# EAGLE board cyclops_r3_silk (EAGLE 6.4), part 1 of 5
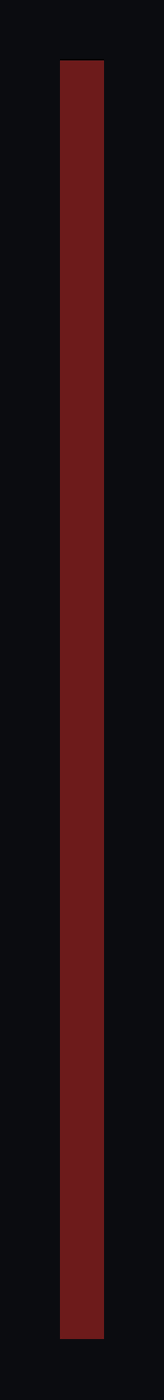
[diagram p0: board, top side]
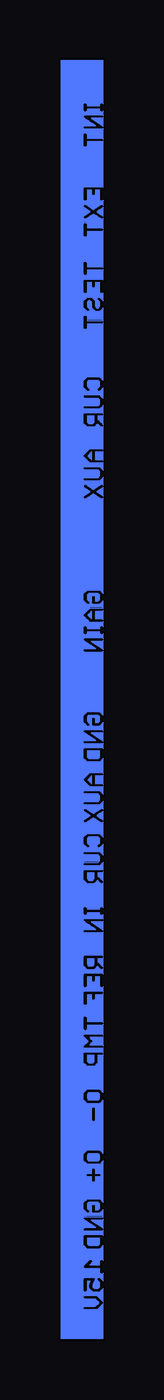
[diagram p1: board, bottom side, seen from below]

No outline drawn. Coordinates in mm, seen from the top.
Copper layers (1*16): Top 0.035mm / dielectric 1.5mm / Bottom 0.035mm
Design rules "default": minimum track width 10mil, minimum drill 24mil, track to track 8mil, track to pad 8mil, pad to pad 8mil, via to via 8mil, smd to smd 8mil, copper to edge 40mil, drill to drill 8mil, minimum pad ring 10mil, minimum via ring 8mil, stop-mask expansion 4mil, vias tented up to drill 0mil, thermal gap 10mil

## Placement (x,y rotation side)

## Tracks (layer width: path | path; a pad name or v marks a point on that pad's centre or on a via)
N$8
  pour Top (no thermals): 0,53.34 1.78,53.34 1.78,0 0,0
S$1
  Bottom 0.025: 0.01,4.98 0,4.99 0,4.98 | 0.01,4.98 0.03,4.95 0.5,4.95 0.04,4.65 0.03,4.65 0.01,4.63 0,4.62 | 0,4.62 0,4.65 | 0,4.65 0,4.67 | 0,4.67 0,4.7 | 0,4.7 0,4.72 | 0,4.72 0,4.75 | 0,4.75 0,4.78 | 0,4.78 0,4.8 | 0,4.8 0,4.83 | 0,4.83 0,4.85 | 0,4.85 0,4.88 | 0,4.88 0,4.9 | 0,4.9 0,4.93 | 0,4.93 0,4.95 | 0,4.95 0,4.98 | 0,4.62 | 0,4.65 0.03,4.65 | 0,4.67 0.08,4.67 | 0,4.7 0.12,4.7 | 0,4.72 0.15,4.72 | 0,4.75 0.19,4.75 | 0,4.78 0.23,4.78 | 0,4.8 0.27,4.8 | 0,4.83 0.31,4.83 | 0,4.85 0.34,4.85 | 0,4.88 0.38,4.88 | 0,4.9 0.42,4.9 | 0,4.93 0.46,4.93 | 0,4.95 0.5,4.95 | 0,4.98 0.01,4.98
S$2
  Bottom 0.025: 0.14,3.99 0.14,3.97 0.21,3.9 0.6,3.9 0.67,3.97 0.67,3.99 | 0.14,3.99 0.14,4.01 | 0.14,4.01 0.14,4.04 | 0.14,4.04 0.14,4.06 | 0.14,4.06 0.14,4.09 | 0.14,4.09 0.14,4.12 | 0.14,4.12 0.14,4.14 | 0.14,4.14 0.14,4.17 | 0.14,4.17 0.14,4.19 | 0.14,4.19 0.14,4.21 0.67,4.21 0.67,4.19 | 0.67,4.19 0.67,4.17 | 0.67,4.17 0.67,4.14 | 0.67,4.14 0.67,4.12 | 0.67,4.12 0.67,4.09 | 0.67,4.09 0.67,4.06 | 0.67,4.06 0.67,4.04 | 0.67,4.04 0.67,4.01 | 0.67,4.01 0.67,3.99 | 0.14,3.99 0.67,3.99 | 0.14,4.01 0.67,4.01 | 0.14,4.04 0.67,4.04 | 0.14,4.06 0.67,4.06 | 0.14,4.09 0.67,4.09 | 0.14,4.12 0.67,4.12 | 0.14,4.14 0.67,4.14 | 0.14,4.17 0.67,4.17 | 0.14,4.19 0.67,4.19
S$3
  Bottom 0.025: 0.2,7.44 0.21,7.43 0.6,7.43 0.62,7.44 | 0.2,7.44 0.17,7.47 | 0.17,7.47 0.15,7.49 | 0.15,7.49 0.14,7.5 0.14,7.52 | 0.14,7.52 0.14,7.54 | 0.14,7.54 0.14,7.57 | 0.14,7.57 0.14,7.59 | 0.14,7.59 0.14,7.62 | 0.14,7.62 0.14,7.64 | 0.14,7.64 0.14,7.67 0.15,7.67 | 0.15,7.67 0.17,7.7 | 0.17,7.7 0.2,7.72 | 0.2,7.72 0.21,7.73 0.6,7.73 0.62,7.72 | 0.62,7.72 0.64,7.7 | 0.64,7.7 0.67,7.67 | 0.67,7.67 0.67,7.64 | 0.67,7.64 0.67,7.62 | 0.67,7.62 0.67,7.59 | 0.67,7.59 0.67,7.57 | 0.67,7.57 0.67,7.54 | 0.67,7.54 0.67,7.52 | 0.67,7.52 0.67,7.5 0.67,7.49 | 0.67,7.49 0.64,7.47 | 0.64,7.47 0.62,7.44 | 0.2,7.44 0.62,7.44 | 0.17,7.47 0.64,7.47 | 0.15,7.49 0.67,7.49 | 0.14,7.52 0.67,7.52 | 0.14,7.54 0.67,7.54 | 0.14,7.57 0.67,7.57 | 0.14,7.59 0.67,7.59 | 0.14,7.62 0.67,7.62 | 0.14,7.64 0.67,7.64 | 0.15,7.67 0.67,7.67 | 0.17,7.7 0.64,7.7 | 0.2,7.72 0.62,7.72
S$4
  Bottom 0.025: 0,35.18 0,35.17 0.27,35.35 0,35.53 0,35.51 | 0,35.18 0,35.2 | 0,35.2 0,35.23 | 0,35.23 0,35.26 | 0,35.26 0,35.28 | 0,35.28 0,35.31 | 0,35.31 0,35.33 | 0,35.33 0,35.36 | 0,35.36 0,35.38 | 0,35.38 0,35.41 | 0,35.41 0,35.43 | 0,35.43 0,35.46 | 0,35.46 0,35.48 | 0,35.48 0,35.51 | 0,35.18 0.01,35.18 | 0,35.2 0.05,35.2 | 0,35.23 0.09,35.23 | 0,35.26 0.13,35.26 | 0,35.28 0.17,35.28 | 0,35.31 0.2,35.31 | 0,35.33 0.24,35.33 | 0,35.36 0.26,35.36 | 0,35.38 0.22,35.38 | 0,35.41 0.18,35.41 | 0,35.43 0.14,35.43 | 0,35.46 0.1,35.46 | 0,35.48 0.07,35.48 | 0,35.51 0.03,35.51
S$5
  Bottom 0.025: 0.01,30.38 0,30.39 0,30.38 | 0.01,30.38 0.03,30.35 0.33,30.35 | 0.33,30.35 0.33,30.33 | 0.33,30.33 0.33,30.3 | 0.33,30.3 0.33,30.28 | 0.33,30.28 0.33,30.25 | 0.33,30.25 0.33,30.23 | 0.33,30.23 0.33,30.2 | 0.33,30.2 0.33,30.18 | 0.33,30.18 0.33,30.15 | 0.33,30.15 0.33,30.12 | 0.33,30.12 0.33,30.1 | 0.33,30.1 0.33,30.07 | 0.33,30.07 0.33,30.05 0.03,30.05 | 0.03,30.05 0.01,30.02 | 0.01,30.02 0,30.02 | 0,30.02 0,30.05 | 0,30.05 0,30.07 | 0,30.07 0,30.1 | 0,30.1 0,30.12 | 0,30.12 0,30.15 | 0,30.15 0,30.18 | 0,30.18 0,30.2 | 0,30.2 0,30.23 | 0,30.23 0,30.25 | 0,30.25 0,30.28 | 0,30.28 0,30.3 | 0,30.3 0,30.33 | 0,30.33 0,30.35 | 0,30.35 0,30.38 | 0,30.02 0.01,30.02 | 0,30.05 0.03,30.05 | 0,30.07 0.33,30.07 | 0,30.1 0.33,30.1 | 0,30.12 0.33,30.12 | 0,30.15 0.33,30.15 | 0,30.18 0.33,30.18 | 0,30.2 0.33,30.2 | 0,30.23 0.33,30.23 | 0,30.25 0.33,30.25 | 0,30.28 0.33,30.28 | 0,30.3 0.33,30.3 | 0,30.33 0.33,30.33 | 0,30.35 0.33,30.35 | 0,30.38 0.01,30.38
S$6
  Bottom 0.025: 0.49,30.35 0.48,30.35 | 0.49,30.35 0.52,30.33 | 0.52,30.33 0.54,30.3 | 0.54,30.3 0.57,30.28 | 0.57,30.28 0.59,30.25 | 0.59,30.25 0.62,30.23 | 0.62,30.23 0.64,30.2 | 0.64,30.2 0.62,30.18 | 0.62,30.18 0.59,30.15 | 0.59,30.15 0.56,30.12 | 0.56,30.12 0.54,30.1 | 0.54,30.1 0.51,30.07 | 0.51,30.07 0.49,30.05 0.48,30.05 0.48,30.07 | 0.48,30.07 0.48,30.1 | 0.48,30.1 0.48,30.12 | 0.48,30.12 0.48,30.15 | 0.48,30.15 0.48,30.18 | 0.48,30.18 0.48,30.2 | 0.48,30.2 0.48,30.23 | 0.48,30.23 0.48,30.25 | 0.48,30.25 0.48,30.28 | 0.48,30.28 0.48,30.3 | 0.48,30.3 0.48,30.33 | 0.48,30.33 0.48,30.35 | 0.48,30.07 0.51,30.07 | 0.48,30.1 0.54,30.1 | 0.48,30.12 0.56,30.12 | 0.48,30.15 0.59,30.15 | 0.48,30.18 0.62,30.18 | 0.48,30.2 0.64,30.2 | 0.48,30.23 0.62,30.23 | 0.48,30.25 0.59,30.25 | 0.48,30.28 0.57,30.28 | 0.48,30.3 0.54,30.3 | 0.48,30.33 0.52,30.33 | 0.48,30.35 0.49,30.35
S$7
  Bottom 0.025: 0.01,28.78 0.03,28.8 0.04,28.8 0.5,29.11 0.03,29.11 0,29.14 0,29.13 | 0.01,28.78 0,28.77 0,28.78 | 0,28.78 0,28.8 | 0,28.8 0,28.83 | 0,28.83 0,28.85 | 0,28.85 0,28.88 | 0,28.88 0,28.91 | 0,28.91 0,28.93 | 0,28.93 0,28.96 | 0,28.96 0,28.98 | 0,28.98 0,29.01 | 0,29.01 0,29.03 | 0,29.03 0,29.06 | 0,29.06 0,29.08 | 0,29.08 0,29.11 | 0,29.11 0,29.13 | 0,28.78 0.01,28.78 | 0,28.8 0.04,28.8 | 0,28.83 0.08,28.83 | 0,28.85 0.12,28.85 | 0,28.88 0.16,28.88 | 0,28.91 0.2,28.91 | 0,28.93 0.23,28.93 | 0,28.96 0.27,28.96 | 0,28.98 0.31,28.98 | 0,29.01 0.35,29.01 | 0,29.03 0.39,29.03 | 0,29.06 0.42,29.06 | 0,29.08 0.46,29.08 | 0,29.11 0.03,29.11 | 0,29.13 0.01,29.13
S$8
  Bottom 0.025: 0.14,24.31 0.14,24.29 0.21,24.22 0.6,24.22 0.67,24.29 0.67,24.31 | 0.14,24.31 0.14,24.33 | 0.14,24.33 0.14,24.36 | 0.14,24.36 0.14,24.38 | 0.14,24.38 0.14,24.41 | 0.14,24.41 0.14,24.43 | 0.14,24.43 0.14,24.46 | 0.14,24.46 0.14,24.49 | 0.14,24.49 0.14,24.51 | 0.14,24.51 0.14,24.53 0.67,24.53 0.67,24.51 | 0.67,24.51 0.67,24.49 | 0.67,24.49 0.67,24.46 | 0.67,24.46 0.67,24.43 | 0.67,24.43 0.67,24.41 | 0.67,24.41 0.67,24.38 | 0.67,24.38 0.67,24.36 | 0.67,24.36 0.67,24.33 | 0.67,24.33 0.67,24.31 | 0.14,24.31 0.67,24.31 | 0.14,24.33 0.67,24.33 | 0.14,24.36 0.67,24.36 | 0.14,24.38 0.67,24.38 | 0.14,24.41 0.67,24.41 | 0.14,24.43 0.67,24.43 | 0.14,24.46 0.67,24.46 | 0.14,24.49 0.67,24.49 | 0.14,24.51 0.67,24.51
S$9
  Bottom 0.025: 0.02,23.5 0,23.51 0,23.5 | 0.02,23.5 0.03,23.48 0.33,23.48 0.33,23.47 | 0.33,23.47 0.33,23.44 | 0.33,23.44 0.33,23.42 | 0.33,23.42 0.33,23.39 | 0.33,23.39 0.33,23.37 | 0.33,23.37 0.33,23.34 | 0.33,23.34 0.33,23.32 | 0.33,23.32 0.33,23.29 | 0.33,23.29 0.33,23.27 | 0.33,23.27 0.33,23.24 | 0.33,23.24 0.33,23.22 | 0.33,23.22 0.33,23.19 | 0.33,23.19 0.33,23.18 0.03,23.18 0.02,23.16 | 0.02,23.16 0,23.14 0,23.16 | 0,23.16 0,23.19 | 0,23.19 0,23.22 | 0,23.22 0,23.24 | 0,23.24 0,23.27 | 0,23.27 0,23.29 | 0,23.29 0,23.32 | 0,23.32 0,23.34 | 0,23.34 0,23.37 | 0,23.37 0,23.39 | 0,23.39 0,23.42 | 0,23.42 0,23.44 | 0,23.44 0,23.47 | 0,23.47 0,23.5 | 0,23.16 0.02,23.16 | 0,23.19 0.33,23.19 | 0,23.22 0.33,23.22 | 0,23.24 0.33,23.24 | 0,23.27 0.33,23.27 | 0,23.29 0.33,23.29 | 0,23.32 0.33,23.32 | 0,23.34 0.33,23.34 | 0,23.37 0.33,23.37 | 0,23.39 0.33,23.39 | 0,23.42 0.33,23.42 | 0,23.44 0.33,23.44 | 0,23.47 0.33,23.47 | 0,23.5 0.02,23.5
S$10
  Bottom 0.025: 0.5,23.47 0.49,23.48 0.48,23.48 0.48,23.47 | 0.5,23.47 0.53,23.44 | 0.53,23.44 0.55,23.42 | 0.55,23.42 0.58,23.39 | 0.58,23.39 0.6,23.37 | 0.6,23.37 0.63,23.34 | 0.63,23.34 0.64,23.33 0.63,23.32 | 0.63,23.32 0.6,23.29 | 0.6,23.29 0.58,23.27 | 0.58,23.27 0.55,23.24 | 0.55,23.24 0.53,23.22 | 0.53,23.22 0.5,23.19 | 0.5,23.19 0.49,23.18 0.48,23.18 0.48,23.19 | 0.48,23.19 0.48,23.22 | 0.48,23.22 0.48,23.24 | 0.48,23.24 0.48,23.27 | 0.48,23.27 0.48,23.29 | 0.48,23.29 0.48,23.32 | 0.48,23.32 0.48,23.34 | 0.48,23.34 0.48,23.37 | 0.48,23.37 0.48,23.39 | 0.48,23.39 0.48,23.42 | 0.48,23.42 0.48,23.44 | 0.48,23.44 0.48,23.47 | 0.48,23.19 0.5,23.19 | 0.48,23.22 0.53,23.22 | 0.48,23.24 0.55,23.24 | 0.48,23.27 0.58,23.27 | 0.48,23.29 0.6,23.29 | 0.48,23.32 0.63,23.32 | 0.48,23.34 0.63,23.34 | 0.48,23.37 0.6,23.37 | 0.48,23.39 0.58,23.39 | 0.48,23.42 0.55,23.42 | 0.48,23.44 0.53,23.44 | 0.48,23.47 0.5,23.47
S$11
  Bottom 0.025: 0.01,25.3 0,25.31 0,25.3 | 0.01,25.3 0.03,25.27 0.5,25.27 0.04,24.97 0.03,24.97 0.01,24.95 0,24.94 | 0,24.94 0,24.97 | 0,24.97 0,24.99 | 0,24.99 0,25.02 | 0,25.02 0,25.04 | 0,25.04 0,25.07 | 0,25.07 0,25.09 | 0,25.09 0,25.12 | 0,25.12 0,25.15 | 0,25.15 0,25.17 | 0,25.17 0,25.2 | 0,25.2 0,25.22 | 0,25.22 0,25.25 | 0,25.25 0,25.27 | 0,25.27 0,25.3 | 0,24.94 | 0,24.97 0.03,24.97 | 0,24.99 0.08,24.99 | 0,25.02 0.12,25.02 | 0,25.04 0.15,25.04 | 0,25.07 0.19,25.07 | 0,25.09 0.23,25.09 | 0,25.12 0.27,25.12 | 0,25.15 0.31,25.15 | 0,25.17 0.34,25.17 | 0,25.2 0.38,25.2 | 0,25.22 0.42,25.22 | 0,25.25 0.46,25.25 | 0,25.27 0.5,25.27 | 0,25.3 0.01,25.3
S$12
  Bottom 0.025: 0.67,38.48 0.67,38.49 0.37,38.49 0.37,38.48 | 0.67,38.48 0.67,38.46 | 0.67,38.46 0.67,38.43 | 0.67,38.43 0.67,38.41 | 0.67,38.41 0.67,38.38 | 0.67,38.38 0.67,38.35 | 0.67,38.35 0.67,38.33 | 0.67,38.33 0.67,38.3 | 0.67,38.3 0.67,38.28 | 0.67,38.28 0.67,38.26 0.6,38.19 0.44,38.19 0.37,38.26 0.37,38.28 | 0.37,38.28 0.37,38.3 | 0.37,38.3 0.37,38.33 | 0.37,38.33 0.37,38.35 | 0.37,38.35 0.37,38.38 | 0.37,38.38 0.37,38.41 | 0.37,38.41 0.37,38.43 | 0.37,38.43 0.37,38.46 | 0.37,38.46 0.37,38.48 | 0.37,38.28 0.67,38.28 | 0.37,38.3 0.67,38.3 | 0.37,38.33 0.67,38.33 | 0.37,38.35 0.67,38.35 | 0.37,38.38 0.67,38.38 | 0.37,38.41 0.67,38.41 | 0.37,38.43 0.67,38.43 | 0.37,38.46 0.67,38.46 | 0.37,38.48 0.67,38.48
S$13
  Bottom 0.025: 0.63,36.83 0.64,36.85 0.49,37 0.48,37 0.48,36.98 | 0.63,36.83 0.6,36.8 | 0.6,36.8 0.57,36.78 | 0.57,36.78 0.55,36.75 | 0.55,36.75 0.52,36.73 | 0.52,36.73 0.5,36.7 | 0.5,36.7 0.49,36.69 0.48,36.69 0.48,36.7 | 0.48,36.7 0.48,36.73 | 0.48,36.73 0.48,36.75 | 0.48,36.75 0.48,36.78 | 0.48,36.78 0.48,36.8 | 0.48,36.8 0.48,36.83 | 0.48,36.83 0.48,36.85 | 0.48,36.85 0.48,36.88 | 0.48,36.88 0.48,36.91 | 0.48,36.91 0.48,36.93 | 0.48,36.93 0.48,36.96 | 0.48,36.96 0.48,36.98 | 0.48,36.7 0.5,36.7 | 0.48,36.73 0.52,36.73 | 0.48,36.75 0.55,36.75 | 0.48,36.78 0.57,36.78 | 0.48,36.8 0.6,36.8 | 0.48,36.83 0.63,36.83 | 0.48,36.85 0.63,36.85 | 0.48,36.88 0.61,36.88 | 0.48,36.91 0.58,36.91 | 0.48,36.93 0.56,36.93 | 0.48,36.96 0.53,36.96 | 0.48,36.98 0.51,36.98
S$14
  Bottom 0.025: 0.33,36.98 0.33,37 0.03,37 0,37.03 0,37.01 | 0.33,36.98 0.33,36.96 | 0.33,36.96 0.33,36.93 | 0.33,36.93 0.33,36.91 | 0.33,36.91 0.33,36.88 | 0.33,36.88 0.33,36.85 | 0.33,36.85 0.33,36.83 | 0.33,36.83 0.33,36.8 | 0.33,36.8 0.33,36.78 | 0.33,36.78 0.33,36.75 | 0.33,36.75 0.33,36.73 | 0.33,36.73 0.33,36.7 | 0.33,36.7 0.33,36.69 0.03,36.69 0.02,36.68 | 0.02,36.68 0,36.66 0,36.68 | 0,36.68 0,36.7 | 0,36.7 0,36.73 | 0,36.73 0,36.75 | 0,36.75 0,36.78 | 0,36.78 0,36.8 | 0,36.8 0,36.83 | 0,36.83 0,36.85 | 0,36.85 0,36.88 | 0,36.88 0,36.91 | 0,36.91 0,36.93 | 0,36.93 0,36.96 | 0,36.96 0,36.98 | 0,36.98 0,37.01 | 0,36.68 0.02,36.68 | 0,36.7 0.33,36.7 | 0,36.73 0.33,36.73 | 0,36.75 0.33,36.75 | 0,36.78 0.33,36.78 | 0,36.8 0.33,36.8 | 0,36.83 0.33,36.83 | 0,36.85 0.33,36.85 | 0,36.88 0.33,36.88 | 0,36.91 0.33,36.91 | 0,36.93 0.33,36.93 | 0,36.96 0.33,36.96 | 0,36.98 0.33,36.98 | 0,37.01 0.02,37.01
S$15
  Bottom 0.025: 0.02,38.51 0,38.53 0,38.51 | 0.02,38.51 0.03,38.49 0.22,38.49 0.22,38.48 | 0.22,38.48 0.22,38.46 | 0.22,38.46 0.22,38.43 | 0.22,38.43 0.22,38.41 | 0.22,38.41 0.22,38.38 | 0.22,38.38 0.22,38.37 0.2,38.35 | 0.2,38.35 0.17,38.33 | 0.17,38.33 0.14,38.3 | 0.14,38.3 0.12,38.28 | 0.12,38.28 0.09,38.25 | 0.09,38.25 0.07,38.23 | 0.07,38.23 0.04,38.2 | 0.04,38.2 0.02,38.18 | 0.02,38.18 0,38.16 0,38.18 | 0,38.18 0,38.2 | 0,38.2 0,38.23 | 0,38.23 0,38.25 | 0,38.25 0,38.28 | 0,38.28 0,38.3 | 0,38.3 0,38.33 | 0,38.33 0,38.35 | 0,38.35 0,38.38 | 0,38.38 0,38.41 | 0,38.41 0,38.43 | 0,38.43 0,38.46 | 0,38.46 0,38.48 | 0,38.48 0,38.51 | 0,38.18 0.02,38.18 | 0,38.2 0.04,38.2 | 0,38.23 0.07,38.23 | 0,38.25 0.09,38.25 | 0,38.28 0.12,38.28 | 0,38.3 0.14,38.3 | 0,38.33 0.17,38.33 | 0,38.35 0.2,38.35 | 0,38.38 0.22,38.38 | 0,38.41 0.22,38.41 | 0,38.43 0.22,38.43 | 0,38.46 0.22,38.46 | 0,38.48 0.22,38.48 | 0,38.51 0.02,38.51
S$16
  Bottom 0.025: 0,50.95 | 0,50.95 0.03,50.93 | 0.03,50.93 0.03,50.92 0.5,50.92 0.04,50.62 0.03,50.62 0.01,50.6 | 0.01,50.6 0,50.59 0,50.6 | 0,50.6 0,50.62 | 0,50.62 0,50.65 | 0,50.65 0,50.67 | 0,50.67 0,50.7 | 0,50.7 0,50.72 | 0,50.72 0,50.75 | 0,50.75 0,50.77 | 0,50.77 0,50.8 | 0,50.8 0,50.83 | 0,50.83 0,50.85 | 0,50.85 0,50.88 | 0,50.88 0,50.9 | 0,50.9 0,50.93 | 0,50.93 0,50.95 | 0,50.6 0.01,50.6 | 0,50.62 0.05,50.62 | 0,50.65 0.09,50.65 | 0,50.67 0.12,50.67 | 0,50.7 0.16,50.7 | 0,50.72 0.2,50.72 | 0,50.75 0.24,50.75 | 0,50.77 0.28,50.77 | 0,50.8 0.31,50.8 | 0,50.83 0.35,50.83 | 0,50.85 0.39,50.85 | 0,50.88 0.43,50.88 | 0,50.9 0.47,50.9 | 0,50.93 0.03,50.93 | 0,50.95
S$17
  Bottom 0.025: 0,46.86 0,46.85 0.14,46.94 | 0,46.86 0,46.89 | 0,46.89 0,46.91 | 0,46.91 0,46.94 | 0,46.94 0,46.97 | 0,46.97 0,46.99 | 0,46.99 0,47.02 | 0,47.02 0,47.04 | 0,47.04 0,47.07 | 0,47.07 0,47.09 | 0,47.09 0,47.12 | 0,47.12 0,47.14 | 0,47.14 0,47.17 | 0,47.17 0,47.19 | 0,47.19 0,47.21 0.27,47.03 0.14,46.94 | 0,46.86 0.02,46.86 | 0,46.89 0.06,46.89 | 0,46.91 0.1,46.91 | 0,46.94 0.14,46.94 | 0,46.97 0.17,46.97 | 0,46.99 0.21,46.99 | 0,47.02 0.25,47.02 | 0,47.04 0.25,47.04 | 0,47.07 0.21,47.07 | 0,47.09 0.17,47.09 | 0,47.12 0.14,47.12 | 0,47.14 0.1,47.14 | 0,47.17 0.06,47.17 | 0,47.19 0.02,47.19
S$18
  Bottom 0.025: 0,21.67 0,21.65 0.13,21.74 | 0,21.67 0,21.69 | 0,21.69 0,21.72 | 0,21.72 0,21.74 | 0,21.74 0,21.77 | 0,21.77 0,21.79 | 0,21.79 0,21.82 | 0,21.82 0,21.84 | 0,21.84 0,21.87 | 0,21.87 0,21.89 | 0,21.89 0,21.92 | 0,21.92 0,21.95 | 0,21.95 0,21.97 | 0,21.97 0,22 | 0,22 0,22.01 0.27,21.83 0.13,21.74 | 0,21.67 0.02,21.67 | 0,21.69 0.06,21.69 | 0,21.72 0.1,21.72 | 0,21.74 0.13,21.74 | 0,21.77 0.17,21.77 | 0,21.79 0.21,21.79 | 0,21.82 0.25,21.82 | 0,21.84 0.25,21.84 | 0,21.87 0.21,21.87 | 0,21.89 0.18,21.89 | 0,21.92 0.14,21.92 | 0,21.95 0.1,21.95 | 0,21.97 0.06,21.97 | 0,22 0.02,22
S$19
  Bottom 0.025: 0.02,19.46 0,19.48 0,19.46 | 0.02,19.46 0.03,19.45 0.22,19.45 0.22,19.43 | 0.22,19.43 0.22,19.41 | 0.22,19.41 0.22,19.38 | 0.22,19.38 0.22,19.36 | 0.22,19.36 0.22,19.33 | 0.22,19.33 0.22,19.32 0.2,19.3 | 0.2,19.3 0.17,19.28 | 0.17,19.28 0.14,19.25 | 0.14,19.25 0.12,19.23 | 0.12,19.23 0.09,19.2 | 0.09,19.2 0.07,19.18 | 0.07,19.18 0.04,19.15 | 0.04,19.15 0.02,19.13 | 0.02,19.13 0,19.11 0,19.13 | 0,19.13 0,19.15 | 0,19.15 0,19.18 | 0,19.18 0,19.2 | 0,19.2 0,19.23 | 0,19.23 0,19.25 | 0,19.25 0,19.28 | 0,19.28 0,19.3 | 0,19.3 0,19.33 | 0,19.33 0,19.36 | 0,19.36 0,19.38 | 0,19.38 0,19.41 | 0,19.41 0,19.43 | 0,19.43 0,19.46 | 0,19.13 0.02,19.13 | 0,19.15 0.04,19.15 | 0,19.18 0.07,19.18 | 0,19.2 0.09,19.2 | 0,19.23 0.12,19.23 | 0,19.25 0.14,19.25 | 0,19.28 0.17,19.28 | 0,19.3 0.2,19.3 | 0,19.33 0.22,19.33 | 0,19.36 0.22,19.36 | 0,19.38 0.22,19.38 | 0,19.41 0.22,19.41 | 0,19.43 0.22,19.43 | 0,19.46 0.02,19.46
S$20
  Bottom 0.025: 0.67,15.85 0.67,15.86 0.37,15.86 0.37,15.85 | 0.67,15.85 0.67,15.82 | 0.67,15.82 0.67,15.8 | 0.67,15.8 0.67,15.77 | 0.67,15.77 0.67,15.75 | 0.67,15.75 0.67,15.72 | 0.67,15.72 0.67,15.7 | 0.67,15.7 0.67,15.67 | 0.67,15.67 0.67,15.65 | 0.67,15.65 0.67,15.63 0.67,15.62 | 0.67,15.62 0.64,15.6 | 0.64,15.6 0.62,15.57 | 0.62,15.57 0.6,15.56 0.44,15.56 0.42,15.57 | 0.42,15.57 0.4,15.6 | 0.4,15.6 0.37,15.62 | 0.37,15.62 0.37,15.63 0.37,15.65 | 0.37,15.65 0.37,15.67 | 0.37,15.67 0.37,15.7 | 0.37,15.7 0.37,15.72 | 0.37,15.72 0.37,15.75 | 0.37,15.75 0.37,15.77 | 0.37,15.77 0.37,15.8 | 0.37,15.8 0.37,15.82 | 0.37,15.82 0.37,15.85 | 0.42,15.57 0.62,15.57 | 0.4,15.6 0.64,15.6 | 0.37,15.62 0.67,15.62 | 0.37,15.65 0.67,15.65 | 0.37,15.67 0.67,15.67 | 0.37,15.7 0.67,15.7 | 0.37,15.72 0.67,15.72 | 0.37,15.75 0.67,15.75 | 0.37,15.77 0.67,15.77 | 0.37,15.8 0.67,15.8 | 0.37,15.82 0.67,15.82 | 0.37,15.85 0.67,15.85
S$21
  Bottom 0.025: 0.02,15.88 0,15.89 0,15.88 | 0.02,15.88 0.03,15.86 0.22,15.86 0.22,15.85 | 0.22,15.85 0.22,15.82 | 0.22,15.82 0.22,15.8 | 0.22,15.8 0.22,15.77 | 0.22,15.77 0.22,15.75 | 0.22,15.75 0.22,15.74 0.2,15.72 | 0.2,15.72 0.17,15.7 | 0.17,15.7 0.15,15.67 | 0.15,15.67 0.12,15.65 | 0.12,15.65 0.1,15.62 | 0.1,15.62 0.07,15.6 | 0.07,15.6 0.04,15.57 | 0.04,15.57 0.02,15.54 | 0.02,15.54 0,15.53 0,15.54 | 0,15.54 0,15.57 | 0,15.57 0,15.6 | 0,15.6 0,15.62 | 0,15.62 0,15.65 | 0,15.65 0,15.67 | 0,15.67 0,15.7 | 0,15.7 0,15.72 | 0,15.72 0,15.75 | 0,15.75 0,15.77 | 0,15.77 0,15.8 | 0,15.8 0,15.82 | 0,15.82 0,15.85 | 0,15.85 0,15.88 | 0,15.54 0.02,15.54 | 0,15.57 0.04,15.57 | 0,15.6 0.07,15.6 | 0,15.62 0.1,15.62 | 0,15.65 0.12,15.65 | 0,15.67 0.15,15.67 | 0,15.7 0.17,15.7 | 0,15.72 0.2,15.72 | 0,15.75 0.22,15.75 | 0,15.77 0.22,15.77 | 0,15.8 0.22,15.8 | 0,15.82 0.22,15.82 | 0,15.85 0.22,15.85 | 0,15.88 0.02,15.88
S$22
  Bottom 0.025: 0,17.42 0,17.43 0,17.42 | 0,17.42 0.03,17.4 | 0.03,17.4 0.03,17.39 0.5,17.39 0.04,17.09 0.03,17.09 0.01,17.07 | 0.01,17.07 0,17.06 0,17.07 | 0,17.07 0,17.09 | 0,17.09 0,17.12 | 0,17.12 0,17.14 | 0,17.14 0,17.17 | 0,17.17 0,17.2 | 0,17.2 0,17.22 | 0,17.22 0,17.25 | 0,17.25 0,17.27 | 0,17.27 0,17.3 | 0,17.3 0,17.32 | 0,17.32 0,17.35 | 0,17.35 0,17.37 | 0,17.37 0,17.4 | 0,17.4 0,17.42 | 0,17.07 0.01,17.07 | 0,17.09 0.05,17.09 | 0,17.12 0.09,17.12 | 0,17.14 0.12,17.14 | 0,17.17 0.16,17.17 | 0,17.2 0.2,17.2 | 0,17.22 0.24,17.22 | 0,17.25 0.28,17.25 | 0,17.27 0.31,17.27 | 0,17.3 0.35,17.3 | 0,17.32 0.39,17.32 | 0,17.35 0.43,17.35 | 0,17.37 0.47,17.37 | 0,17.4 0.03,17.4 | 0,17.42
S$23
  Bottom 0.025: 0.67,19.43 0.67,19.45 0.37,19.45 0.37,19.43 | 0.67,19.43 0.67,19.41 | 0.67,19.41 0.67,19.38 | 0.67,19.38 0.67,19.36 | 0.67,19.36 0.67,19.33 | 0.67,19.33 0.67,19.3 | 0.67,19.3 0.67,19.28 | 0.67,19.28 0.67,19.25 | 0.67,19.25 0.67,19.23 | 0.67,19.23 0.67,19.21 0.6,19.14 0.44,19.14 0.37,19.21 0.37,19.23 | 0.37,19.23 0.37,19.25 | 0.37,19.25 0.37,19.28 | 0.37,19.28 0.37,19.3 | 0.37,19.3 0.37,19.33 | 0.37,19.33 0.37,19.36 | 0.37,19.36 0.37,19.38 | 0.37,19.38 0.37,19.41 | 0.37,19.41 0.37,19.43 | 0.37,19.23 0.67,19.23 | 0.37,19.25 0.67,19.25 | 0.37,19.28 0.67,19.28 | 0.37,19.3 0.67,19.3 | 0.37,19.33 0.67,19.33 | 0.37,19.36 0.67,19.36 | 0.37,19.38 0.67,19.38 | 0.37,19.41 0.67,19.41 | 0.37,19.43 0.67,19.43
S$24
  Bottom 0.025: 0.67,11.81 0.67,11.82 0.37,11.82 0.37,11.81 | 0.67,11.81 0.67,11.79 | 0.67,11.79 0.67,11.76 | 0.67,11.76 0.67,11.73 | 0.67,11.73 0.67,11.71 | 0.67,11.71 0.67,11.68 | 0.67,11.68 0.67,11.66 | 0.67,11.66 0.67,11.63 | 0.67,11.63 0.67,11.61 | 0.67,11.61 0.67,11.59 0.6,11.52 0.44,11.52 0.37,11.59 0.37,11.61 | 0.37,11.61 0.37,11.63 | 0.37,11.63 0.37,11.66 | 0.37,11.66 0.37,11.68 | 0.37,11.68 0.37,11.71 | 0.37,11.71 0.37,11.73 | 0.37,11.73 0.37,11.76 | 0.37,11.76 0.37,11.79 | 0.37,11.79 0.37,11.81 | 0.37,11.61 0.67,11.61 | 0.37,11.63 0.67,11.63 | 0.37,11.66 0.67,11.66 | 0.37,11.68 0.67,11.68 | 0.37,11.71 0.67,11.71 | 0.37,11.73 0.67,11.73 | 0.37,11.76 0.67,11.76 | 0.37,11.79 0.67,11.79 | 0.37,11.81 0.67,11.81
S$25
  Bottom 0.025: 0.01,12.6 0,12.61 0,12.6 | 0.01,12.6 0.03,12.57 0.57,12.57 0.56,12.57 | 0.56,12.57 0.54,12.55 | 0.54,12.55 0.51,12.52 | 0.51,12.52 0.49,12.5 | 0.49,12.5 0.46,12.47 | 0.46,12.47 0.45,12.45 | 0.45,12.45 0.45,12.42 | 0.45,12.42 0.45,12.39 | 0.45,12.39 0.47,12.37 | 0.47,12.37 0.49,12.34 | 0.49,12.34 0.52,12.32 | 0.52,12.32 0.54,12.29 | 0.54,12.29 0.57,12.27 0.03,12.27 | 0.03,12.27 0.01,12.24 | 0.01,12.24 0,12.24 | 0,12.24 0,12.27 | 0,12.27 0,12.29 | 0,12.29 0,12.32 | 0,12.32 0,12.34 | 0,12.34 0,12.37 | 0,12.37 0,12.39 | 0,12.39 0,12.42 | 0,12.42 0,12.45 | 0,12.45 0,12.47 | 0,12.47 0,12.5 | 0,12.5 0,12.52 | 0,12.52 0,12.55 | 0,12.55 0,12.57 | 0,12.57 0,12.6 | 0,12.24 0.01,12.24 | 0,12.27 0.03,12.27 | 0,12.29 0.54,12.29 | 0,12.32 0.52,12.32 | 0,12.34 0.49,12.34 | 0,12.37 0.47,12.37 | 0,12.39 0.45,12.39 | 0,12.42 0.45,12.42 | 0,12.45 0.45,12.45 | 0,12.47 0.46,12.47 | 0,12.5 0.49,12.5 | 0,12.52 0.51,12.52 | 0,12.55 0.54,12.55 | 0,12.57 0.56,12.57 | 0,12.6 0.01,12.6
S$26
  Bottom 0.025: 0.2,9.98 0.21,9.97 0.6,9.97 0.62,9.98 | 0.2,9.98 0.17,10.01 | 0.17,10.01 0.15,10.03 | 0.15,10.03 0.14,10.04 0.14,10.06 | 0.14,10.06 0.14,10.08 | 0.14,10.08 0.14,10.11 | 0.14,10.11 0.14,10.13 | 0.14,10.13 0.14,10.16 | 0.14,10.16 0.14,10.19 | 0.14,10.19 0.14,10.2 0.15,10.21 | 0.15,10.21 0.17,10.24 | 0.17,10.24 0.2,10.26 | 0.2,10.26 0.21,10.27 0.6,10.27 0.62,10.26 | 0.62,10.26 0.64,10.24 | 0.64,10.24 0.67,10.21 | 0.67,10.21 0.67,10.2 0.67,10.19 | 0.67,10.19 0.67,10.16 | 0.67,10.16 0.67,10.13 | 0.67,10.13 0.67,10.11 | 0.67,10.11 0.67,10.08 | 0.67,10.08 0.67,10.06 | 0.67,10.06 0.67,10.04 0.67,10.03 | 0.67,10.03 0.64,10.01 | 0.64,10.01 0.62,9.98 | 0.2,9.98 0.62,9.98 | 0.17,10.01 0.64,10.01 | 0.15,10.03 0.67,10.03 | 0.14,10.06 0.67,10.06 | 0.14,10.08 0.67,10.08 | 0.14,10.11 0.67,10.11 | 0.14,10.13 0.67,10.13 | 0.14,10.16 0.67,10.16 | 0.14,10.19 0.67,10.19 | 0.15,10.21 0.67,10.21 | 0.17,10.24 0.64,10.24 | 0.2,10.26 0.62,10.26
S$27
  Bottom 0.025: 0.83,1.73 0.83,1.71 0.78,1.67 0.32,1.67 0.31,1.65 | 0.83,1.73 0.83,1.75 | 0.83,1.75 0.83,1.77 0.82,1.78 | 0.82,1.78 0.8,1.8 | 0.8,1.8 0.78,1.82 0.26,1.82 0.22,1.77 0.03,1.59 0,1.56 0,1.57 | 0,1.57 0,1.6 | 0,1.6 0,1.63 | 0,1.63 0,1.65 | 0,1.65 0,1.68 | 0,1.68 0,1.7 | 0,1.7 0,1.73 | 0,1.73 0,1.75 | 0,1.75 0,1.78 | 0,1.78 0,1.8 | 0,1.8 0,1.83 | 0,1.83 0,1.85 | 0,1.85 0,1.88 | 0,1.88 0,1.91 | 0,1.91 0,1.93 | 0,1.93 0,1.96 | 0,1.96 0,1.98 | 0,1.98 0,2.01 | 0,2.01 0,2.03 | 0,2.03 0,2.06 | 0,2.06 0,2.08 | 0,2.08 0,2.1 0.02,2.08 | 0.02,2.08 0.04,2.06 | 0.04,2.06 0.07,2.03 | 0.07,2.03 0.1,2.01 | 0.1,2.01 0.1,2 0.14,1.96 0.15,1.96 0.44,1.96 0.46,1.98 | 0.46,1.98 0.49,2.01 | 0.49,2.01 0.51,2.03 | 0.51,2.03 0.54,2.06 | 0.54,2.06 0.56,2.08 | 0.56,2.08 0.59,2.11 | 0.59,2.11 0.6,2.12 0.6,2.13 | 0.6,2.13 0.6,2.16 | 0.6,2.16 0.6,2.18 | 0.6,2.18 0.6,2.21 | 0.6,2.21 0.6,2.23 | 0.6,2.23 0.6,2.25 0.6,2.27 0.6,2.28 0.6,2.29 | 0.6,2.29 0.58,2.31 0.53,2.41 0.67,2.41 | 0.67,2.41 0.67,2.39 | 0.67,2.39 0.67,2.36 | 0.67,2.36 0.67,2.34 | 0.67,2.34 0.67,2.31 | 0.67,2.31 0.67,2.29 | 0.67,2.29 0.67,2.26 | 0.67,2.26 0.67,2.23 | 0.67,2.23 0.67,2.21 | 0.67,2.21 0.67,2.18 | 0.67,2.18 0.67,2.16 | 0.67,2.16 0.67,2.13 | 0.67,2.13 0.67,2.11 | 0.67,2.11 0.67,2.08 | 0.67,2.08 0.67,2.06 | 0.67,2.06 0.67,2.03 | 0.67,2.03 0.67,2.01 | 0.67,2.01 0.67,2 0.69,1.98 | 0.69,1.98 0.72,1.96 0.78,1.96 0.83,2 0.83,2.01 | 0.83,2.01 0.83,2.03 | 0.83,2.03 0.83,2.06 | 0.83,2.06 0.83,2.08 | 0.83,2.08 0.83,2.11 | 0.83,2.11 0.83,2.13 | 0.83,2.13 0.83,2.16 | 0.83,2.16 0.83,2.18 | 0.83,2.18 0.83,2.21 | 0.83,2.21 0.83,2.23 | 0.83,2.23 0.83,2.26 | 0.83,2.26 0.83,2.29 | 0.83,2.29 0.83,2.31 | 0.83,2.31 0.83,2.34 | 0.83,2.34 0.83,2.36 | 0.83,2.36 0.83,2.39 | 0.83,2.39 0.83,2.41
  Bottom 0.025: 0.83,2.41 0.83,2.44 | 0.83,2.44 0.83,2.46 | 0.83,2.46 0.83,2.49 | 0.83,2.49 0.83,2.52 | 0.83,2.52 0.81,2.54 | 0.81,2.54 0.78,2.56 | 0.78,2.56 0.78,2.57 0.42,2.57 0.4,2.57 0.39,2.57 0.38,2.57 0.36,2.55 0.34,2.54 0.34,2.53 0.33,2.52 | 0.33,2.52 0.33,2.5 0.32,2.48 0.33,2.47 0.33,2.46 | 0.33,2.46 0.34,2.44 0.45,2.24 0.45,2.23 | 0.45,2.23 0.45,2.21 | 0.45,2.21 0.45,2.18 | 0.45,2.18 0.42,2.16 | 0.42,2.16 0.4,2.13 | 0.4,2.13 0.38,2.11 0.21,2.11 0.18,2.13 | 0.18,2.13 0.16,2.16 | 0.16,2.16 0.14,2.18 | 0.14,2.18 0.14,2.21 | 0.14,2.21 0.14,2.23 | 0.14,2.23 0.14,2.26 | 0.14,2.26 0.14,2.29 | 0.14,2.29 0.14,2.31 | 0.14,2.31 0.14,2.34 | 0.14,2.34 0.16,2.36 | 0.16,2.36 0.18,2.39 | 0.18,2.39 0.21,2.41 | 0.21,2.41 0.23,2.44 | 0.23,2.44 0.25,2.46 | 0.25,2.46 0.25,2.49 | 0.25,2.49 0.25,2.52 | 0.25,2.52 0.21,2.57 0.15,2.57 0,2.42 0,2.44 | 0,2.44 0,2.46 | 0,2.46 0,2.49 | 0,2.49 0,2.52 | 0,2.52 0,2.54 | 0,2.54 0,2.56 | 0,2.56 0,2.59 | 0,2.59 0,2.62 | 0,2.62 0,2.64 | 0,2.64 0,2.67 | 0,2.67 0,2.69 | 0,2.69 0,2.72 | 0,2.72 0,2.74 0.02,2.72 | 0.02,2.72 0.03,2.71 0.1,2.71 0.11,2.72 | 0.11,2.72 0.13,2.74 | 0.13,2.74 0.14,2.75 0.14,2.77 | 0.14,2.77 0.14,2.79 | 0.14,2.79 0.14,2.82 | 0.14,2.82 0.14,2.85 | 0.14,2.85 0.14,2.87 | 0.14,2.87 0.14,2.9 | 0.14,2.9 0.14,2.92 | 0.14,2.92 0.14,2.93 0.78,2.93 0.83,2.98 0.83,3 | 0.83,3 0.83,3.02 | 0.83,3.02 0.83,3.04 0.78,3.09 0.55,3.31 0.49,3.31 0.48,3.3 | 0.48,3.3 0.45,3.28 | 0.45,3.28 0.45,3.27 0.45,3.25 | 0.45,3.25 0.45,3.23 | 0.45,3.23 0.45,3.21 0.45,3.2 | 0.45,3.2 0.48,3.17 | 0.48,3.17 0.5,3.15 | 0.5,3.15 0.53,3.12 | 0.53,3.12 0.55,3.1 | 0.55,3.1 0.57,3.09 0.14,3.09 0.14,3.1 | 0.14,3.1 0.14,3.12 | 0.14,3.12 0.14,3.15 | 0.14,3.15 0.14,3.17 | 0.14,3.17 0.14,3.2
  Bottom 0.025: 0.14,3.2 0.14,3.23 | 0.14,3.23 0.14,3.25 | 0.14,3.25 0.14,3.27 0.13,3.28 | 0.13,3.28 0.11,3.3 | 0.11,3.3 0.1,3.31 0.03,3.31 0.02,3.3 | 0.02,3.3 0,3.28 0,3.3 | 0,3.3 0,3.33 | 0,3.33 0,3.35 | 0,3.35 0,3.38 | 0,3.38 0,3.4 | 0,3.4 0,3.43 | 0,3.43 0,3.45 | 0,3.45 0,3.48 | 0,3.48 0,3.5 | 0,3.5 0,3.53 | 0,3.53 0,3.56 | 0,3.56 0,3.58 | 0,3.58 0,3.61 | 0,3.61 0,3.63 | 0,3.63 0,3.66 | 0,3.66 0,3.68 | 0,3.68 0,3.71 | 0,3.71 0,3.73 | 0,3.73 0,3.76 | 0,3.76 0,3.79 | 0,3.79 0,3.81 | 0,3.81 0,3.83 | 0,3.83 0,3.86 | 0,3.86 0,3.89 | 0,3.89 0.01,3.89 | 0.01,3.89 0.03,3.86 | 0.03,3.86 0.06,3.83 | 0.06,3.83 0.08,3.81 | 0.08,3.81 0.11,3.79 | 0.11,3.79 0.14,3.76 | 0.14,3.76 0.15,3.75 0.67,3.75 0.68,3.76 | 0.68,3.76 0.7,3.79 | 0.7,3.79 0.71,3.79 0.78,3.86 0.83,3.91 | 0.83,3.91 0.83,3.94 | 0.83,3.94 0.83,3.96 | 0.83,3.96 0.83,3.99 | 0.83,3.99 0.83,4.01 | 0.83,4.01 0.83,4.04 | 0.83,4.04 0.83,4.06 | 0.83,4.06 0.83,4.09 | 0.83,4.09 0.83,4.12 | 0.83,4.12 0.83,4.14 | 0.83,4.14 0.83,4.17 | 0.83,4.17 0.83,4.19 | 0.83,4.19 0.83,4.22 | 0.83,4.22 0.83,4.24 | 0.83,4.24 0.83,4.27 | 0.83,4.27 0.83,4.29 | 0.83,4.29 0.83,4.31 0.82,4.32 | 0.82,4.32 0.8,4.34 | 0.8,4.34 0.78,4.36 0.03,4.36 0,4.33 0,4.34 | 0,4.34 0,4.37 | 0,4.37 0,4.39 | 0,4.39 0,4.42 | 0,4.42 0,4.45 | 0,4.45 0,4.47 | 0,4.47 0,4.5 | 0,4.5 0,4.52 | 0,4.52 0,4.53 0,4.52 0.02,4.5 0.03,4.5 0.06,4.5 0.08,4.49 0.09,4.5 0.78,4.5 0.83,4.54 0.83,4.55 | 0.83,4.55 0.83,4.57 | 0.83,4.57 0.83,4.6 | 0.83,4.6 0.78,4.65 | 0.78,4.65 0.32,4.65 0.77,4.95 0.78,4.95 0.8,4.97 0.82,4.98 0.82,4.99 0.83,5 | 0.83,5 0.83,5.02 0.83,5.05 | 0.83,5.05 0.83,5.06 0.81,5.08 0.8,5.1 0.79,5.1 0.78,5.11 | 0.78,5.11 0.76,5.11 0.73,5.11 0.03,5.11 0,5.07 0,5.08 | 0,5.08 0,5.11 | 0,5.11 0,5.13 | 0,5.13 0,5.16
  Bottom 0.025: 0,5.16 0,5.18 | 0,5.18 0,5.21 | 0,5.21 0,5.23 | 0,5.23 0,5.26 | 0,5.26 0,5.28 | 0,5.28 0,5.31 | 0,5.31 0,5.33 | 0,5.33 0,5.36 | 0,5.36 0,5.38 | 0,5.38 0,5.39 0.01,5.38 | 0.01,5.38 0.03,5.36 | 0.03,5.36 0.06,5.33 | 0.06,5.33 0.08,5.31 | 0.08,5.31 0.11,5.28 | 0.11,5.28 0.13,5.26 | 0.13,5.26 0.15,5.25 0.44,5.25 0.48,5.29 0.48,5.31 | 0.48,5.31 0.48,5.33 | 0.48,5.33 0.48,5.36 | 0.48,5.36 0.48,5.38 | 0.48,5.38 0.48,5.41 | 0.48,5.41 0.48,5.44 | 0.48,5.44 0.48,5.46 | 0.48,5.46 0.48,5.49 | 0.48,5.49 0.48,5.51 | 0.48,5.51 0.48,5.54 | 0.48,5.54 0.48,5.56 | 0.48,5.56 0.48,5.58 0.48,5.59 | 0.48,5.59 0.45,5.61 | 0.45,5.61 0.44,5.63 0.38,5.63 0.36,5.61 | 0.36,5.61 0.34,5.59 | 0.34,5.59 0.33,5.58 0.33,5.56 | 0.33,5.56 0.33,5.54 | 0.33,5.54 0.33,5.51 | 0.33,5.51 0.33,5.49 | 0.33,5.49 0.33,5.46 | 0.33,5.46 0.33,5.44 | 0.33,5.44 0.33,5.41 | 0.33,5.41 0.33,5.4 0.21,5.4 0.2,5.41 | 0.2,5.41 0.17,5.44 | 0.17,5.44 0.15,5.46 | 0.15,5.46 0.14,5.47 0.14,5.49 | 0.14,5.49 0.14,5.51 | 0.14,5.51 0.14,5.54 | 0.14,5.54 0.14,5.56 | 0.14,5.56 0.14,5.59 | 0.14,5.59 0.14,5.61 | 0.14,5.61 0.14,5.63 0.15,5.64 | 0.15,5.64 0.17,5.66 | 0.17,5.66 0.2,5.69 | 0.2,5.69 0.21,5.7 0.6,5.7 0.62,5.69 | 0.62,5.69 0.64,5.66 | 0.64,5.66 0.67,5.64 | 0.67,5.64 0.67,5.63 0.67,5.61 | 0.67,5.61 0.67,5.59 | 0.67,5.59 0.67,5.56 | 0.67,5.56 0.67,5.54 | 0.67,5.54 0.67,5.51 | 0.67,5.51 0.67,5.49 | 0.67,5.49 0.67,5.47 0.67,5.46 | 0.67,5.46 0.64,5.44 | 0.64,5.44 0.62,5.41 | 0.62,5.41 0.59,5.38 | 0.59,5.38 0.57,5.36 | 0.57,5.36 0.56,5.35 0.56,5.33 | 0.56,5.33 0.56,5.31 | 0.56,5.31 0.56,5.29 0.56,5.28 | 0.56,5.28 0.59,5.26 | 0.59,5.26 0.6,5.25 0.67,5.25 0.78,5.36 | 0.78,5.36 0.83,5.4 0.83,5.41 | 0.83,5.41 0.83,5.44 | 0.83,5.44 0.83,5.46 | 0.83,5.46 0.83,5.49
  Bottom 0.025: 0.83,5.49 0.83,5.51 | 0.83,5.51 0.83,5.54 | 0.83,5.54 0.83,5.56 | 0.83,5.56 0.83,5.59 | 0.83,5.59 0.83,5.61 | 0.83,5.61 0.83,5.64 | 0.83,5.64 0.83,5.66 | 0.83,5.66 0.83,5.69 | 0.83,5.69 0.83,5.7 0.67,5.86 0.15,5.86 0.13,5.84 | 0.13,5.84 0.11,5.82 | 0.11,5.82 0.08,5.79 | 0.08,5.79 0.06,5.77 | 0.06,5.77 0.03,5.74 | 0.03,5.74 0.01,5.71 | 0.01,5.71 0,5.71 | 0,5.71 0,5.74 | 0,5.74 0,5.77 | 0,5.77 0,5.79 | 0,5.79 0,5.82 | 0,5.82 0,5.84 | 0,5.84 0,5.87 | 0,5.87 0,5.89 | 0,5.89 0,5.92 | 0,5.92 0,5.94 | 0,5.94 0,5.97 | 0,5.97 0,5.99 | 0,5.99 0,6.02 | 0,6.02 0,6.04 | 0,6.04 0,6.07 | 0,6.07 0,6.1 | 0,6.1 0,6.12 | 0,6.12 0,6.15 | 0,6.15 0,6.17 | 0,6.17 0,6.2 | 0,6.2 0,6.22 | 0,6.22 0,6.25 | 0,6.25 0,6.27 | 0,6.27 0,6.3 | 0,6.3 0,6.33 | 0,6.33 0,6.35 | 0,6.35 0,6.38 | 0,6.38 0,6.4 | 0,6.4 0,6.43 | 0,6.43 0,6.45 | 0,6.45 0,6.48 | 0,6.48 0,6.5 | 0,6.5 0,6.53 | 0,6.53 0,6.55 | 0,6.55 0,6.58 | 0,6.58 0,6.6 | 0,6.6 0,6.63 | 0,6.63 0,6.66 | 0,6.66 0,6.68 | 0,6.68 0,6.71 | 0,6.71 0,6.73 | 0,6.73 0,6.76 | 0,6.76 0,6.78 | 0,6.78 0,6.81 | 0,6.81 0,6.83 | 0,6.83 0,6.86 | 0,6.86 0,6.88 | 0,6.88 0,6.91 | 0,6.91 0,6.93 | 0,6.93 0,6.96 | 0,6.96 0,6.99 | 0,6.99 0,7.01 | 0,7.01 0,7.04 | 0,7.04 0,7.06 | 0,7.06 0,7.09 | 0,7.09 0,7.11 | 0,7.11 0,7.14 | 0,7.14 0,7.16 | 0,7.16 0,7.19 | 0,7.19 0,7.21 | 0,7.21 0,7.24 | 0,7.24 0,7.26 | 0,7.26 0,7.29 | 0,7.29 0,7.32 | 0,7.32 0,7.34 | 0,7.34 0,7.37 | 0,7.37 0,7.39 | 0,7.39 0,7.42 | 0,7.42 0.01,7.42 | 0.01,7.42 0.03,7.39 | 0.03,7.39 0.06,7.37 | 0.06,7.37 0.08,7.34 | 0.08,7.34 0.11,7.32 | 0.11,7.32 0.13,7.29 | 0.13,7.29 0.15,7.28 0.67,7.28 0.71,7.32 0.78,7.39 | 0.78,7.39 0.83,7.44 | 0.83,7.44 0.83,7.47 | 0.83,7.47 0.83,7.49 | 0.83,7.49 0.83,7.52 | 0.83,7.52 0.83,7.54 | 0.83,7.54 0.83,7.57 | 0.83,7.57 0.83,7.59 | 0.83,7.59 0.83,7.62 | 0.83,7.62 0.83,7.64
  Bottom 0.025: 0.83,7.64 0.83,7.67 | 0.83,7.67 0.83,7.7 | 0.83,7.7 0.83,7.72 | 0.83,7.72 0.83,7.73 0.67,7.89 0.15,7.89 0.13,7.87 | 0.13,7.87 0.11,7.85 | 0.11,7.85 0.08,7.82 | 0.08,7.82 0.06,7.8 | 0.06,7.8 0.03,7.77 | 0.03,7.77 0.01,7.75 | 0.01,7.75 0,7.74 0,7.75 | 0,7.75 0,7.77 | 0,7.77 0,7.8 | 0,7.8 0,7.82 | 0,7.82 0,7.85 | 0,7.85 0,7.87 | 0,7.87 0,7.9 | 0,7.9 0,7.92 | 0,7.92 0,7.95 | 0,7.95 0,7.98 | 0,7.98 0,8 | 0,8 0,8.03 | 0,8.03 0,8.05 | 0,8.05 0,8.08 | 0,8.08 0,8.1 | 0,8.1 0,8.13 | 0,8.13 0,8.15 | 0,8.15 0,8.18 | 0,8.18 0,8.2 | 0,8.2 0,8.23 | 0,8.23 0,8.26 | 0,8.26 0,8.28 | 0,8.28 0,8.31 | 0,8.31 0,8.33 | 0,8.33 0,8.36 | 0,8.36 0,8.38 | 0,8.38 0,8.41 | 0,8.41 0,8.43 | 0,8.43 0,8.46 | 0,8.46 0,8.48 | 0,8.48 0,8.51 | 0,8.51 0,8.53 | 0,8.53 0,8.56 | 0,8.56 0,8.59 | 0,8.59 0,8.61 | 0,8.61 0,8.64 | 0,8.64 0,8.66 | 0,8.66 0,8.69 | 0,8.69 0,8.71 | 0,8.71 0,8.74 | 0,8.74 0,8.76 | 0,8.76 0,8.79 | 0,8.79 0,8.81 | 0,8.81 0,8.84 | 0,8.84 0,8.87 | 0,8.87 0,8.89 | 0,8.89 0,8.91 | 0,8.91 0,8.94 | 0,8.94 0,8.97 | 0,8.97 0,8.99 | 0,8.99 0,9.02 | 0,9.02 0,9.04 | 0,9.04 0,9.07 | 0,9.07 0,9.09 | 0,9.09 0,9.12 | 0,9.12 0,9.14 | 0,9.14 0,9.17 | 0,9.17 0,9.2 | 0,9.2 0,9.22 | 0,9.22 0,9.25 | 0,9.25 0,9.27 | 0,9.27 0,9.3 | 0,9.3 0,9.32 | 0,9.32 0,9.35 | 0,9.35 0,9.37 | 0,9.37 0,9.4 | 0,9.4 0,9.42 | 0,9.42 0,9.45 | 0,9.45 0,9.47 | 0,9.47 0,9.5 | 0,9.5 0,9.53 | 0,9.53 0,9.55 | 0,9.55 0,9.58 | 0,9.58 0,9.6 | 0,9.6 0,9.63 | 0,9.63 0,9.65 | 0,9.65 0,9.68 | 0,9.68 0,9.7 | 0,9.7 0,9.73 | 0,9.73 0,9.75 | 0,9.75 0,9.78 | 0,9.78 0,9.8 | 0,9.8 0,9.83 | 0,9.83 0,9.86 | 0,9.86 0,9.88 | 0,9.88 0,9.91 | 0,9.91 0,9.93 | 0,9.93 0,9.96 | 0,9.96 0.01,9.96 | 0.01,9.96 0.03,9.93 | 0.03,9.93 0.06,9.91 | 0.06,9.91 0.08,9.88 | 0.08,9.88 0.11,9.86 | 0.11,9.86 0.13,9.83 | 0.13,9.83 0.15,9.82 0.67,9.82 0.71,9.86 0.78,9.93 | 0.78,9.93 0.83,9.98
  Bottom 0.025: 0.83,9.98 0.83,10.01 | 0.83,10.01 0.83,10.03 | 0.83,10.03 0.83,10.06 | 0.83,10.06 0.83,10.08 | 0.83,10.08 0.83,10.11 | 0.83,10.11 0.83,10.13 | 0.83,10.13 0.83,10.16 | 0.83,10.16 0.83,10.19 | 0.83,10.19 0.83,10.21 | 0.83,10.21 0.83,10.24 | 0.83,10.24 0.83,10.26 | 0.83,10.26 0.83,10.27 0.67,10.43 0.15,10.43 0.13,10.41 | 0.13,10.41 0.11,10.39 | 0.11,10.39 0.08,10.36 | 0.08,10.36 0.06,10.34 | 0.06,10.34 0.03,10.31 | 0.03,10.31 0.01,10.29 | 0.01,10.29 0,10.28 0,10.29 | 0,10.29 0,10.31 | 0,10.31 0,10.34 | 0,10.34 0,10.36 | 0,10.36 0,10.39 | 0,10.39 0,10.41 | 0,10.41 0,10.44 | 0,10.44 0,10.46 | 0,10.46 0,10.49 | 0,10.49 0,10.52 | 0,10.52 0,10.54 | 0,10.54 0,10.57 | 0,10.57 0,10.59 | 0,10.59 0,10.62 | 0,10.62 0,10.64 | 0,10.64 0,10.67 | 0,10.67 0,10.69 | 0,10.69 0,10.72 | 0,10.72 0,10.74 | 0,10.74 0,10.77 | 0,10.77 0,10.79 | 0,10.79 0,10.82 | 0,10.82 0,10.85 | 0,10.85 0,10.87 | 0,10.87 0,10.9 | 0,10.9 0,10.92 | 0,10.92 0,10.95 | 0,10.95 0,10.97 | 0,10.97 0,11 | 0,11 0,11.02 | 0,11.02 0,11.05 | 0,11.05 0,11.07 | 0,11.07 0,11.1 | 0,11.1 0,11.12 | 0,11.12 0,11.15 | 0,11.15 0,11.18 | 0,11.18 0,11.2 | 0,11.2 0,11.23 | 0,11.23 0,11.25 | 0,11.25 0,11.28 | 0,11.28 0,11.3 | 0,11.3 0,11.33 | 0,11.33 0,11.35 | 0,11.35 0,11.38 | 0,11.38 0,11.4 | 0,11.4 0,11.43 | 0,11.43 0,11.46 | 0,11.46 0,11.48 | 0,11.48 0,11.51 | 0,11.51 0,11.53 | 0,11.53 0,11.56 | 0,11.56 0,11.58 | 0,11.58 0,11.61 | 0,11.61 0,11.63 | 0,11.63 0,11.66 | 0,11.66 0,11.68 | 0,11.68 0,11.71 | 0,11.71 0,11.73 | 0,11.73 0,11.76 | 0,11.76 0,11.79 | 0,11.79 0,11.81 | 0,11.81 0,11.84 | 0,11.84 0,11.86 0.02,11.84 | 0.02,11.84 0.03,11.82 0.22,11.82 0.22,11.81 | 0.22,11.81 0.22,11.79 | 0.22,11.79 0.22,11.76 | 0.22,11.76 0.22,11.73 | 0.22,11.73 0.22,11.71 | 0.22,11.71 0.22,11.68 | 0.22,11.68 0.22,11.66
  Bottom 0.025: 0.22,11.66 0.22,11.63 | 0.22,11.63 0.22,11.61 | 0.22,11.61 0.22,11.58 | 0.22,11.58 0.22,11.56 | 0.22,11.56 0.22,11.53 | 0.22,11.53 0.24,11.51 | 0.24,11.51 0.26,11.48 | 0.26,11.48 0.29,11.46 | 0.29,11.46 0.31,11.43 | 0.31,11.43 0.34,11.4 | 0.34,11.4 0.36,11.38 | 0.36,11.38 0.38,11.37 0.67,11.37 0.68,11.38 | 0.68,11.38 0.7,11.4 | 0.7,11.4 0.71,11.41 0.78,11.48 0.83,11.53 | 0.83,11.53 0.83,11.56 | 0.83,11.56 0.83,11.58 | 0.83,11.58 0.83,11.61 | 0.83,11.61 0.83,11.63 | 0.83,11.63 0.83,11.66 | 0.83,11.66 0.83,11.68 | 0.83,11.68 0.83,11.71 | 0.83,11.71 0.83,11.73 | 0.83,11.73 0.83,11.76 | 0.83,11.76 0.83,11.79 | 0.83,11.79 0.83,11.81 | 0.83,11.81 0.83,11.84 | 0.83,11.84 0.83,11.86 | 0.83,11.86 0.83,11.89 | 0.83,11.89 0.83,11.91 | 0.83,11.91 0.83,11.93 0.82,11.94 | 0.82,11.94 0.8,11.96 | 0.8,11.96 0.78,11.98 0.03,11.98 0,11.95 0,11.96 | 0,11.96 0,11.99 | 0,11.99 0,12.01 | 0,12.01 0,12.04 | 0,12.04 0,12.06 | 0,12.06 0,12.09 | 0,12.09 0,12.12 | 0,12.12 0,12.14 | 0,12.14 0,12.15 0.01,12.14 | 0.01,12.14 0.03,12.12 0.78,12.12 0.83,12.16 0.83,12.17 | 0.83,12.17 0.83,12.19 | 0.83,12.19 0.83,12.22 | 0.83,12.22 0.82,12.23 0.63,12.42 | 0.63,12.42 0.65,12.45 | 0.65,12.45 0.68,12.47 | 0.68,12.47 0.7,12.5 | 0.7,12.5 0.73,12.52 | 0.73,12.52 0.76,12.55 | 0.76,12.55 0.78,12.57 | 0.78,12.57 0.81,12.6 | 0.81,12.6 0.83,12.62 | 0.83,12.62 0.83,12.65 | 0.83,12.65 0.83,12.68 | 0.83,12.68 0.81,12.7 | 0.81,12.7 0.78,12.72 | 0.78,12.72 0.78,12.73 0.03,12.73 0,12.69 0,12.7 | 0,12.7 0,12.72 | 0,12.72 0,12.75 | 0,12.75 0,12.78 | 0,12.78 0,12.8 | 0,12.8 0,12.83 | 0,12.83 0,12.85 | 0,12.85 0,12.88 | 0,12.88 0,12.9 | 0,12.9 0,12.93 | 0,12.93 0,12.95 | 0,12.95 0,12.98 | 0,12.98 0,13.01 | 0,13.01 0,13.03 | 0,13.03 0,13.06
  Bottom 0.025: 0,13.06 0,13.08 | 0,13.08 0,13.11 | 0,13.11 0,13.12 0.02,13.11 | 0.02,13.11 0.03,13.09 0.67,13.09 0.67,13.08 | 0.67,13.08 0.67,13.06 | 0.67,13.06 0.67,13.03 | 0.67,13.03 0.67,13.01 | 0.67,13.01 0.67,12.98 | 0.67,12.98 0.67,12.95 | 0.67,12.95 0.67,12.93 | 0.67,12.93 0.67,12.91 0.68,12.9 | 0.68,12.9 0.7,12.88 | 0.7,12.88 0.72,12.87 0.78,12.87 0.83,12.91 0.83,12.93 | 0.83,12.93 0.83,12.95 | 0.83,12.95 0.83,12.98 | 0.83,12.98 0.83,13.01 | 0.83,13.01 0.83,13.03 | 0.83,13.03 0.83,13.06 | 0.83,13.06 0.83,13.08 | 0.83,13.08 0.83,13.11 | 0.83,13.11 0.83,13.13 | 0.83,13.13 0.83,13.16 | 0.83,13.16 0.83,13.18 | 0.83,13.18 0.83,13.21 | 0.83,13.21 0.83,13.23 | 0.83,13.23 0.83,13.26 | 0.83,13.26 0.83,13.28 | 0.83,13.28 0.83,13.31 | 0.83,13.31 0.83,13.34 | 0.83,13.34 0.83,13.36 | 0.83,13.36 0.83,13.39 | 0.83,13.39 0.83,13.41 | 0.83,13.41 0.83,13.43 0.78,13.47 0.72,13.47 0.71,13.46 | 0.71,13.46 0.68,13.44 | 0.68,13.44 0.67,13.43 0.67,13.41 | 0.67,13.41 0.67,13.39 | 0.67,13.39 0.67,13.36 | 0.67,13.36 0.67,13.34 | 0.67,13.34 0.67,13.31 | 0.67,13.31 0.67,13.28 | 0.67,13.28 0.67,13.26 | 0.67,13.26 0.67,13.25 0.03,13.25 0.02,13.23 | 0.02,13.23 0,13.21 0,13.23 | 0,13.23 0,13.26 | 0,13.26 0,13.28 | 0,13.28 0,13.31 | 0,13.31 0,13.34 | 0,13.34 0,13.36 | 0,13.36 0,13.39 | 0,13.39 0,13.41 | 0,13.41 0,13.44 | 0,13.44 0,13.46 | 0,13.46 0,13.49 | 0,13.49 0,13.51 | 0,13.51 0,13.54 | 0,13.54 0,13.56 | 0,13.56 0,13.59 | 0,13.59 0,13.61 | 0,13.61 0,13.64 | 0,13.64 0,13.66 | 0,13.66 0,13.69 | 0,13.69 0,13.72 | 0,13.72 0,13.74 | 0,13.74 0,13.77 | 0,13.77 0,13.79 | 0,13.79 0,13.82 | 0,13.82 0,13.84 | 0,13.84 0,13.87 | 0,13.87 0,13.89 | 0,13.89 0,13.92 | 0,13.92 0,13.95 | 0,13.95 0,13.97 | 0,13.97 0,13.99 | 0,13.99 0,14.02 | 0,14.02 0,14.05
  Bottom 0.025: 0,14.05 0,14.07 | 0,14.07 0,14.1 | 0,14.1 0,14.12 | 0,14.12 0,14.15 | 0,14.15 0,14.17 | 0,14.17 0,14.2 | 0,14.2 0,14.22 | 0,14.22 0,14.25 | 0,14.25 0,14.28 | 0,14.28 0,14.3 | 0,14.3 0,14.33 | 0,14.33 0,14.35 | 0,14.35 0,14.38 | 0,14.38 0,14.4 0.02,14.38 | 0.02,14.38 0.03,14.37 0.33,14.37 0.33,14.35 | 0.33,14.35 0.33,14.33 | 0.33,14.33 0.33,14.3 | 0.33,14.3 0.33,14.28 | 0.33,14.28 0.33,14.25 | 0.33,14.25 0.33,14.22 | 0.33,14.22 0.33,14.2 | 0.33,14.2 0.33,14.18 0.34,14.17 | 0.34,14.17 0.36,14.15 | 0.36,14.15 0.38,14.14 0.44,14.14 0.45,14.15 | 0.45,14.15 0.47,14.17 | 0.47,14.17 0.48,14.18 0.48,14.2 | 0.48,14.2 0.48,14.22 | 0.48,14.22 0.48,14.25 | 0.48,14.25 0.48,14.28 | 0.48,14.28 0.48,14.3 | 0.48,14.3 0.48,14.33 | 0.48,14.33 0.48,14.35 | 0.48,14.35 0.48,14.37 0.67,14.37 0.67,14.35 | 0.67,14.35 0.67,14.33 | 0.67,14.33 0.67,14.3 | 0.67,14.3 0.67,14.28 | 0.67,14.28 0.67,14.25 | 0.67,14.25 0.67,14.22 | 0.67,14.22 0.67,14.2 | 0.67,14.2 0.67,14.17 | 0.67,14.17 0.67,14.15 | 0.67,14.15 0.67,14.12 | 0.67,14.12 0.67,14.1 | 0.67,14.1 0.67,14.07 | 0.67,14.07 0.67,14.05 | 0.67,14.05 0.67,14.02 | 0.67,14.02 0.67,13.99 | 0.67,13.99 0.67,13.97 | 0.67,13.97 0.67,13.95 0.68,13.95 | 0.68,13.95 0.71,13.92 | 0.71,13.92 0.72,13.91 0.78,13.91 0.83,13.95 0.83,13.97 | 0.83,13.97 0.83,13.99 | 0.83,13.99 0.83,14.02 | 0.83,14.02 0.83,14.05 | 0.83,14.05 0.83,14.07 | 0.83,14.07 0.83,14.1 | 0.83,14.1 0.83,14.12 | 0.83,14.12 0.83,14.15 | 0.83,14.15 0.83,14.17 | 0.83,14.17 0.83,14.2 | 0.83,14.2 0.83,14.22 | 0.83,14.22 0.83,14.25 | 0.83,14.25 0.83,14.28 | 0.83,14.28 0.83,14.3 | 0.83,14.3 0.83,14.33 | 0.83,14.33 0.83,14.35 | 0.83,14.35 0.83,14.38 | 0.83,14.38 0.83,14.4 | 0.83,14.4 0.83,14.43 | 0.83,14.43 0.83,14.45 | 0.83,14.45 0.83,14.47 0.82,14.48
  Bottom 0.025: 0.82,14.48 0.8,14.5 | 0.8,14.5 0.78,14.52 0.03,14.52 0,14.49 0,14.5 | 0,14.5 0,14.53 | 0,14.53 0,14.55 | 0,14.55 0,14.58 | 0,14.58 0,14.61 | 0,14.61 0,14.63 | 0,14.63 0,14.66 | 0,14.66 0,14.68 | 0,14.68 0,14.69 0.01,14.68 | 0.01,14.68 0.03,14.66 0.1,14.66 0.12,14.68 | 0.12,14.68 0.14,14.7 0.14,14.71 | 0.14,14.71 0.14,14.73 | 0.14,14.73 0.14,14.76 | 0.14,14.76 0.14,14.78 | 0.14,14.78 0.14,14.81 | 0.14,14.81 0.14,14.83 | 0.14,14.83 0.14,14.86 | 0.14,14.86 0.14,14.88 | 0.14,14.88 0.14,14.91 | 0.14,14.91 0.14,14.94 | 0.14,14.94 0.14,14.96 | 0.14,14.96 0.14,14.99 | 0.14,14.99 0.14,15.01 | 0.14,15.01 0.14,15.04 | 0.14,15.04 0.14,15.06 | 0.14,15.06 0.14,15.09 | 0.14,15.09 0.14,15.11 | 0.14,15.11 0.33,15.11 | 0.33,15.11 0.33,15.09 | 0.33,15.09 0.33,15.06 | 0.33,15.06 0.33,15.04 | 0.33,15.04 0.33,15.01 | 0.33,15.01 0.33,14.99 | 0.33,14.99 0.33,14.96 | 0.33,14.96 0.33,14.94 | 0.33,14.94 0.33,14.93 0.35,14.91 | 0.35,14.91 0.38,14.88 0.44,14.88 0.46,14.91 | 0.46,14.91 0.48,14.93 0.48,14.94 | 0.48,14.94 0.48,14.96 | 0.48,14.96 0.48,14.99 | 0.48,14.99 0.48,15.01 | 0.48,15.01 0.48,15.04 | 0.48,15.04 0.48,15.06 | 0.48,15.06 0.48,15.09 | 0.48,15.09 0.48,15.11 | 0.48,15.11 0.67,15.11 | 0.67,15.11 0.67,15.09 | 0.67,15.09 0.67,15.06 | 0.67,15.06 0.67,15.04 | 0.67,15.04 0.67,15.01 | 0.67,15.01 0.67,14.99 | 0.67,14.99 0.67,14.96 | 0.67,14.96 0.67,14.94 | 0.67,14.94 0.67,14.91 | 0.67,14.91 0.67,14.88 | 0.67,14.88 0.67,14.86 | 0.67,14.86 0.67,14.83 | 0.67,14.83 0.67,14.81 | 0.67,14.81 0.67,14.78 | 0.67,14.78 0.67,14.76 | 0.67,14.76 0.67,14.73 | 0.67,14.73 0.67,14.71 | 0.67,14.71 0.67,14.7 0.69,14.68 | 0.69,14.68 0.72,14.66 0.78,14.66 0.83,14.7 0.83,14.71 | 0.83,14.71 0.83,14.73 | 0.83,14.73 0.83,14.76
  Bottom 0.025: 0.83,14.76 0.83,14.78 | 0.83,14.78 0.83,14.81 | 0.83,14.81 0.83,14.83 | 0.83,14.83 0.83,14.86 | 0.83,14.86 0.83,14.88 | 0.83,14.88 0.83,14.91 | 0.83,14.91 0.83,14.94 | 0.83,14.94 0.83,14.96 | 0.83,14.96 0.83,14.99 | 0.83,14.99 0.83,15.01 | 0.83,15.01 0.83,15.04 | 0.83,15.04 0.83,15.06 | 0.83,15.06 0.83,15.09 | 0.83,15.09 0.83,15.11 | 0.83,15.11 0.83,15.14 | 0.83,15.14 0.83,15.16 | 0.83,15.16 0.83,15.19 | 0.83,15.19 0.83,15.21 | 0.83,15.21 0.83,15.22 0.81,15.24 | 0.81,15.24 0.78,15.27 | 0.78,15.27 0.03,15.27 0,15.23 0,15.24 | 0,15.24 0,15.27 | 0,15.27 0,15.29 | 0,15.29 0,15.32 | 0,15.32 0,15.34 | 0,15.34 0,15.37 | 0,15.37 0,15.39 | 0,15.39 0,15.42 | 0,15.42 0,15.44 0.02,15.42 | 0.02,15.42 0.03,15.4 0.1,15.4 0.11,15.42 | 0.11,15.42 0.13,15.44 | 0.13,15.44 0.16,15.47 | 0.16,15.47 0.23,15.54 0.26,15.52 | 0.26,15.52 0.29,15.49 | 0.29,15.49 0.31,15.47 | 0.31,15.47 0.34,15.44 | 0.34,15.44 0.36,15.42 | 0.36,15.42 0.38,15.4 0.67,15.4 0.71,15.45 0.78,15.52 | 0.78,15.52 0.83,15.56 0.83,15.57 | 0.83,15.57 0.83,15.6 | 0.83,15.6 0.83,15.62 | 0.83,15.62 0.83,15.65 | 0.83,15.65 0.83,15.67 | 0.83,15.67 0.83,15.7 | 0.83,15.7 0.83,15.72 | 0.83,15.72 0.83,15.75 | 0.83,15.75 0.83,15.77 | 0.83,15.77 0.83,15.8 | 0.83,15.8 0.83,15.82 | 0.83,15.82 0.83,15.85 | 0.83,15.85 0.83,15.88 | 0.83,15.88 0.83,15.9 | 0.83,15.9 0.83,15.93 | 0.83,15.93 0.83,15.95 | 0.83,15.95 0.83,15.97 0.78,16.02 0.03,16.02 0.02,16 | 0.02,16 0,15.98 0,16 | 0,16 0,16.03 | 0,16.03 0,16.05 | 0,16.05 0,16.08 | 0,16.08 0,16.1 | 0,16.1 0,16.13 | 0,16.13 0,16.15 | 0,16.15 0,16.18 | 0,16.18 0,16.2 | 0,16.2 0,16.23 | 0,16.23 0,16.26 | 0,16.26 0,16.28 | 0,16.28 0,16.31 | 0,16.31 0,16.33 | 0,16.33 0,16.36 | 0,16.36 0,16.38 | 0,16.38 0,16.41 | 0,16.41 0,16.43
  Bottom 0.025: 0,16.43 0,16.46 | 0,16.46 0,16.48 | 0,16.48 0,16.51 | 0,16.51 0,16.54 | 0,16.54 0,16.56 | 0,16.56 0,16.59 | 0,16.59 0,16.61 | 0,16.61 0,16.64 | 0,16.64 0,16.66 | 0,16.66 0,16.69 | 0,16.69 0,16.71 | 0,16.71 0,16.74 | 0,16.74 0,16.76 | 0,16.76 0,16.79 | 0,16.79 0,16.82 | 0,16.82 0,16.84 | 0,16.84 0,16.87 | 0,16.87 0,16.89 | 0,16.89 0,16.92 | 0,16.92 0,16.94 | 0,16.94 0,16.97 | 0,16.97 | 0,16.97 0,16.96 0.02,16.95 0.03,16.94 | 0.03,16.94 0.06,16.94 0.08,16.93 0.09,16.94 0.78,16.94 0.83,16.98 0.83,16.99 | 0.83,16.99 0.83,17.02 | 0.83,17.02 0.83,17.04 | 0.83,17.04 0.83,17.05 0.8,17.07 | 0.8,17.07 0.78,17.09 0.32,17.09 | 0.32,17.09 0.36,17.12 | 0.36,17.12 0.4,17.14 | 0.4,17.14 0.43,17.17 | 0.43,17.17 0.47,17.2 | 0.47,17.2 0.51,17.22 | 0.51,17.22 0.55,17.25 | 0.55,17.25 0.59,17.27 | 0.59,17.27 0.63,17.3 | 0.63,17.3 0.66,17.32 | 0.66,17.32 0.7,17.35 | 0.7,17.35 0.74,17.37 | 0.74,17.37 0.77,17.39 0.78,17.39 0.8,17.41 0.82,17.43 0.83,17.44 0.83,17.45 | 0.83,17.45 0.83,17.46 0.83,17.49 0.83,17.5 | 0.83,17.5 0.81,17.52 0.8,17.54 0.79,17.54 0.78,17.55 0.76,17.55 0.73,17.55 0.03,17.55 0,17.52 0,17.53 | 0,17.53 0,17.55 | 0,17.55 0,17.58 | 0,17.58 0,17.6 | 0,17.6 0,17.63 | 0,17.63 0,17.65 | 0,17.65 0,17.68 | 0,17.68 0,17.7 0.02,17.68 | 0.02,17.68 0.03,17.67 0.1,17.67 0.11,17.68 | 0.11,17.68 0.13,17.7 | 0.13,17.7 0.14,17.71 0.14,17.73 | 0.14,17.73 0.14,17.75 | 0.14,17.75 0.14,17.78 0.67,17.78 0.67,17.75 | 0.67,17.75 0.67,17.73 | 0.67,17.73 0.67,17.71 0.68,17.7 | 0.68,17.7 0.7,17.68 | 0.7,17.68 0.72,17.67 0.78,17.67 0.83,17.71 0.83,17.73 | 0.83,17.73 0.83,17.75 | 0.83,17.75 0.83,17.78 | 0.83,17.78 0.83,17.8 | 0.83,17.8 0.83,17.83 | 0.83,17.83 0.83,17.86 | 0.83,17.86 0.83,17.88 | 0.83,17.88 0.83,17.91
  Bottom 0.025: 0.83,17.91 0.83,17.93 | 0.83,17.93 0.83,17.96 | 0.83,17.96 0.83,17.98 | 0.83,17.98 0.83,18 0.78,18.05 0.72,18.05 0.71,18.03 | 0.71,18.03 0.68,18.01 | 0.68,18.01 0.67,18 0.67,17.98 | 0.67,17.98 0.67,17.96 | 0.67,17.96 0.67,17.93 | 0.67,17.93 | 0.67,17.93 0.14,17.93 | 0.14,17.93 | 0.14,17.93 0.14,17.96 | 0.14,17.96 0.14,17.98 | 0.14,17.98 0.14,18 0.13,18.01 | 0.13,18.01 0.11,18.03 | 0.11,18.03 0.1,18.05 0.03,18.05 0.02,18.03 | 0.02,18.03 0,18.02 0,18.03 | 0,18.03 0,18.06 | 0,18.06 0,18.09 | 0,18.09 0,18.11 | 0,18.11 0,18.14 | 0,18.14 0,18.16 | 0,18.16 0,18.19 | 0,18.19 0,18.21 | 0,18.21 0,18.24 | 0,18.24 0,18.26 | 0,18.26 0,18.29 | 0,18.29 0,18.31 | 0,18.31 0,18.34 | 0,18.34 0,18.36 | 0,18.36 0,18.39 | 0,18.39 0,18.41 | 0,18.41 0,18.44 | 0,18.44 0,18.47 | 0,18.47 0,18.49 | 0,18.49 0,18.52 | 0,18.52 0,18.54 | 0,18.54 0,18.57 | 0,18.57 0,18.59 | 0,18.59 0,18.62 | 0,18.62 0,18.64 | 0,18.64 0,18.67 | 0,18.67 0,18.69 | 0,18.69 0,18.72 | 0,18.72 0,18.75 | 0,18.75 0,18.77 | 0,18.77 0,18.8 | 0,18.8 0,18.82 | 0,18.82 0,18.85 | 0,18.85 0,18.87 | 0,18.87 0,18.9 | 0,18.9 0,18.92 | 0,18.92 0,18.95 | 0,18.95 0,18.97 | 0,18.97 0,19 | 0,19 0,19.02 0.02,19 | 0.02,19 0.03,18.99 0.1,18.99 0.11,19 | 0.11,19 0.13,19.02 | 0.13,19.02 0.16,19.05 | 0.16,19.05 0.18,19.07 | 0.18,19.07 0.21,19.1 | 0.21,19.1 0.23,19.13 | 0.23,19.13 0.24,19.13 | 0.24,19.13 0.26,19.1 | 0.26,19.1 0.29,19.07 | 0.29,19.07 0.31,19.05 | 0.31,19.05 0.34,19.02 | 0.34,19.02 0.36,19 | 0.36,19 0.38,18.99 0.67,18.99 0.68,19 | 0.68,19 0.7,19.02 | 0.7,19.02 0.71,19.03 0.78,19.1 0.83,19.15 | 0.83,19.15 0.83,19.18 | 0.83,19.18 0.83,19.2 | 0.83,19.2 0.83,19.23 | 0.83,19.23 0.83,19.25 | 0.83,19.25 0.83,19.28 | 0.83,19.28 0.83,19.3 | 0.83,19.3 0.83,19.33 | 0.83,19.33 0.83,19.36
  Bottom 0.025: 0.83,19.36 0.83,19.38 | 0.83,19.38 0.83,19.41 | 0.83,19.41 0.83,19.43 | 0.83,19.43 0.83,19.46 | 0.83,19.46 0.83,19.48 | 0.83,19.48 0.83,19.51 | 0.83,19.51 0.83,19.53 | 0.83,19.53 0.83,19.55 0.82,19.56 | 0.82,19.56 0.8,19.58 | 0.8,19.58 0.78,19.6 0.03,19.6 0,19.57 0,19.58 | 0,19.58 0,19.61 | 0,19.61 0,19.63 | 0,19.63 0,19.66 | 0,19.66 0,19.68 | 0,19.68 0,19.71 | 0,19.71 0,19.74 | 0,19.74 0,19.76 | 0,19.76 0,19.79 | 0,19.79 0,19.81 | 0,19.81 0,19.84 | 0,19.84 0,19.86 | 0,19.86 0,19.88 0.02,19.86 | 0.02,19.86 0.04,19.84 | 0.04,19.84 0.07,19.81 | 0.07,19.81 0.1,19.79 | 0.1,19.79 0.12,19.76 | 0.12,19.76 0.15,19.74 0.78,19.74 0.83,19.78 0.83,19.79 | 0.83,19.79 0.83,19.81 | 0.83,19.81 0.83,19.84 | 0.83,19.84 0.78,19.89 | 0.78,19.89 0.21,19.89 0.18,19.91 | 0.18,19.91 0.16,19.94 | 0.16,19.94 0.14,19.96 | 0.14,19.96 0.14,19.99 | 0.14,19.99 0.14,20.02 | 0.14,20.02 0.14,20.04 | 0.14,20.04 0.14,20.07 | 0.14,20.07 0.14,20.09 | 0.14,20.09 0.14,20.12 | 0.14,20.12 0.16,20.14 | 0.16,20.14 0.18,20.17 | 0.18,20.17 0.21,20.19 | 0.21,20.19 0.78,20.19 0.83,20.24 | 0.83,20.24 0.83,20.27 | 0.83,20.27 0.83,20.3 | 0.83,20.3 0.81,20.32 | 0.81,20.32 0.78,20.34 | 0.78,20.34 0.78,20.35 0.15,20.35 0.14,20.34 | 0.14,20.34 0.1,20.3 | 0.1,20.3 0.03,20.23 0,20.2 0,20.22 | 0,20.22 0,20.24 | 0,20.24 0,20.27 | 0,20.27 0,20.3 | 0,20.3 0,20.32 | 0,20.32 0,20.34 | 0,20.34 0,20.37 | 0,20.37 0,20.4 | 0,20.4 0,20.42 | 0,20.42 0,20.45 | 0,20.45 0,20.47 | 0,20.47 0,20.5 | 0,20.5 0,20.52 | 0,20.52 0,20.55 | 0,20.55 0,20.57 | 0,20.57 0,20.6 | 0,20.6 0,20.62 | 0,20.62 0,20.63 0.01,20.62 | 0.01,20.62 0.03,20.6 | 0.03,20.6 0.06,20.57 | 0.06,20.57 0.08,20.55 | 0.08,20.55 0.11,20.52 | 0.11,20.52 0.13,20.5 | 0.13,20.5 0.15,20.48 0.21,20.48 0.25,20.53 0.25,20.55
  Bottom 0.025: 0.25,20.55 0.25,20.57 | 0.25,20.57 0.25,20.59 0.25,20.6 | 0.25,20.6 0.22,20.62 | 0.22,20.62 0.2,20.65 | 0.2,20.65 0.17,20.68 | 0.17,20.68 0.15,20.7 | 0.15,20.7 0.14,20.71 0.14,20.73 | 0.14,20.73 0.14,20.75 | 0.14,20.75 0.14,20.78 | 0.14,20.78 0.14,20.8 | 0.14,20.8 0.14,20.83 | 0.14,20.83 0.14,20.85 | 0.14,20.85 0.14,20.87 0.15,20.88 | 0.15,20.88 0.17,20.9 | 0.17,20.9 0.2,20.93 | 0.2,20.93 0.21,20.94 0.6,20.94 0.62,20.93 | 0.62,20.93 0.64,20.9 | 0.64,20.9 0.67,20.88 | 0.67,20.88 0.67,20.87 0.67,20.85 | 0.67,20.85 0.67,20.83 | 0.67,20.83 0.67,20.8 | 0.67,20.8 0.67,20.78 | 0.67,20.78 0.67,20.75 | 0.67,20.75 0.67,20.73 | 0.67,20.73 0.67,20.71 0.67,20.7 | 0.67,20.7 0.64,20.68 | 0.64,20.68 0.62,20.65 | 0.62,20.65 0.59,20.62 | 0.59,20.62 0.57,20.6 | 0.57,20.6 0.56,20.59 0.56,20.57 | 0.56,20.57 0.56,20.55 | 0.56,20.55 0.56,20.53 0.56,20.52 | 0.56,20.52 0.59,20.5 | 0.59,20.5 0.6,20.48 0.67,20.48 0.78,20.6 | 0.78,20.6 0.83,20.64 0.83,20.65 | 0.83,20.65 0.83,20.68 | 0.83,20.68 0.83,20.7 | 0.83,20.7 0.83,20.73 | 0.83,20.73 0.83,20.75 | 0.83,20.75 0.83,20.78 | 0.83,20.78 0.83,20.8 | 0.83,20.8 0.83,20.83 | 0.83,20.83 0.83,20.85 | 0.83,20.85 0.83,20.88 | 0.83,20.88 0.83,20.9 | 0.83,20.9 0.83,20.93 | 0.83,20.93 0.83,20.94 0.67,21.09 0.15,21.09 0.13,21.08 | 0.13,21.08 0.11,21.06 | 0.11,21.06 0.08,21.03 | 0.08,21.03 0.06,21.01 | 0.06,21.01 0.03,20.98 | 0.03,20.98 0.01,20.95 | 0.01,20.95 0,20.95 | 0,20.95 0,20.98 | 0,20.98 0,21.01 | 0,21.01 0,21.03 | 0,21.03 0,21.06 | 0,21.06 0,21.08 | 0,21.08 0,21.11 | 0,21.11 0,21.13 | 0,21.13 0,21.16 | 0,21.16 0,21.18 | 0,21.18 0,21.21 | 0,21.21 0,21.23 | 0,21.23 0,21.26 | 0,21.26 0,21.29 | 0,21.29 0,21.31 | 0,21.31 0,21.34 | 0,21.34 0,21.36 | 0,21.36 0,21.39 | 0,21.39 0,21.41